# Altium PCB PCB_B1.PcbDoc
Units mm, origin at the board's own origin, x right, y up, seen from the top; angles counter-clockwise.
Board outline 40 x 40 mm, 2 copper layers (Top Layer, Bottom Layer); 52 components, 52 nets, 213 pads, 32 vias.
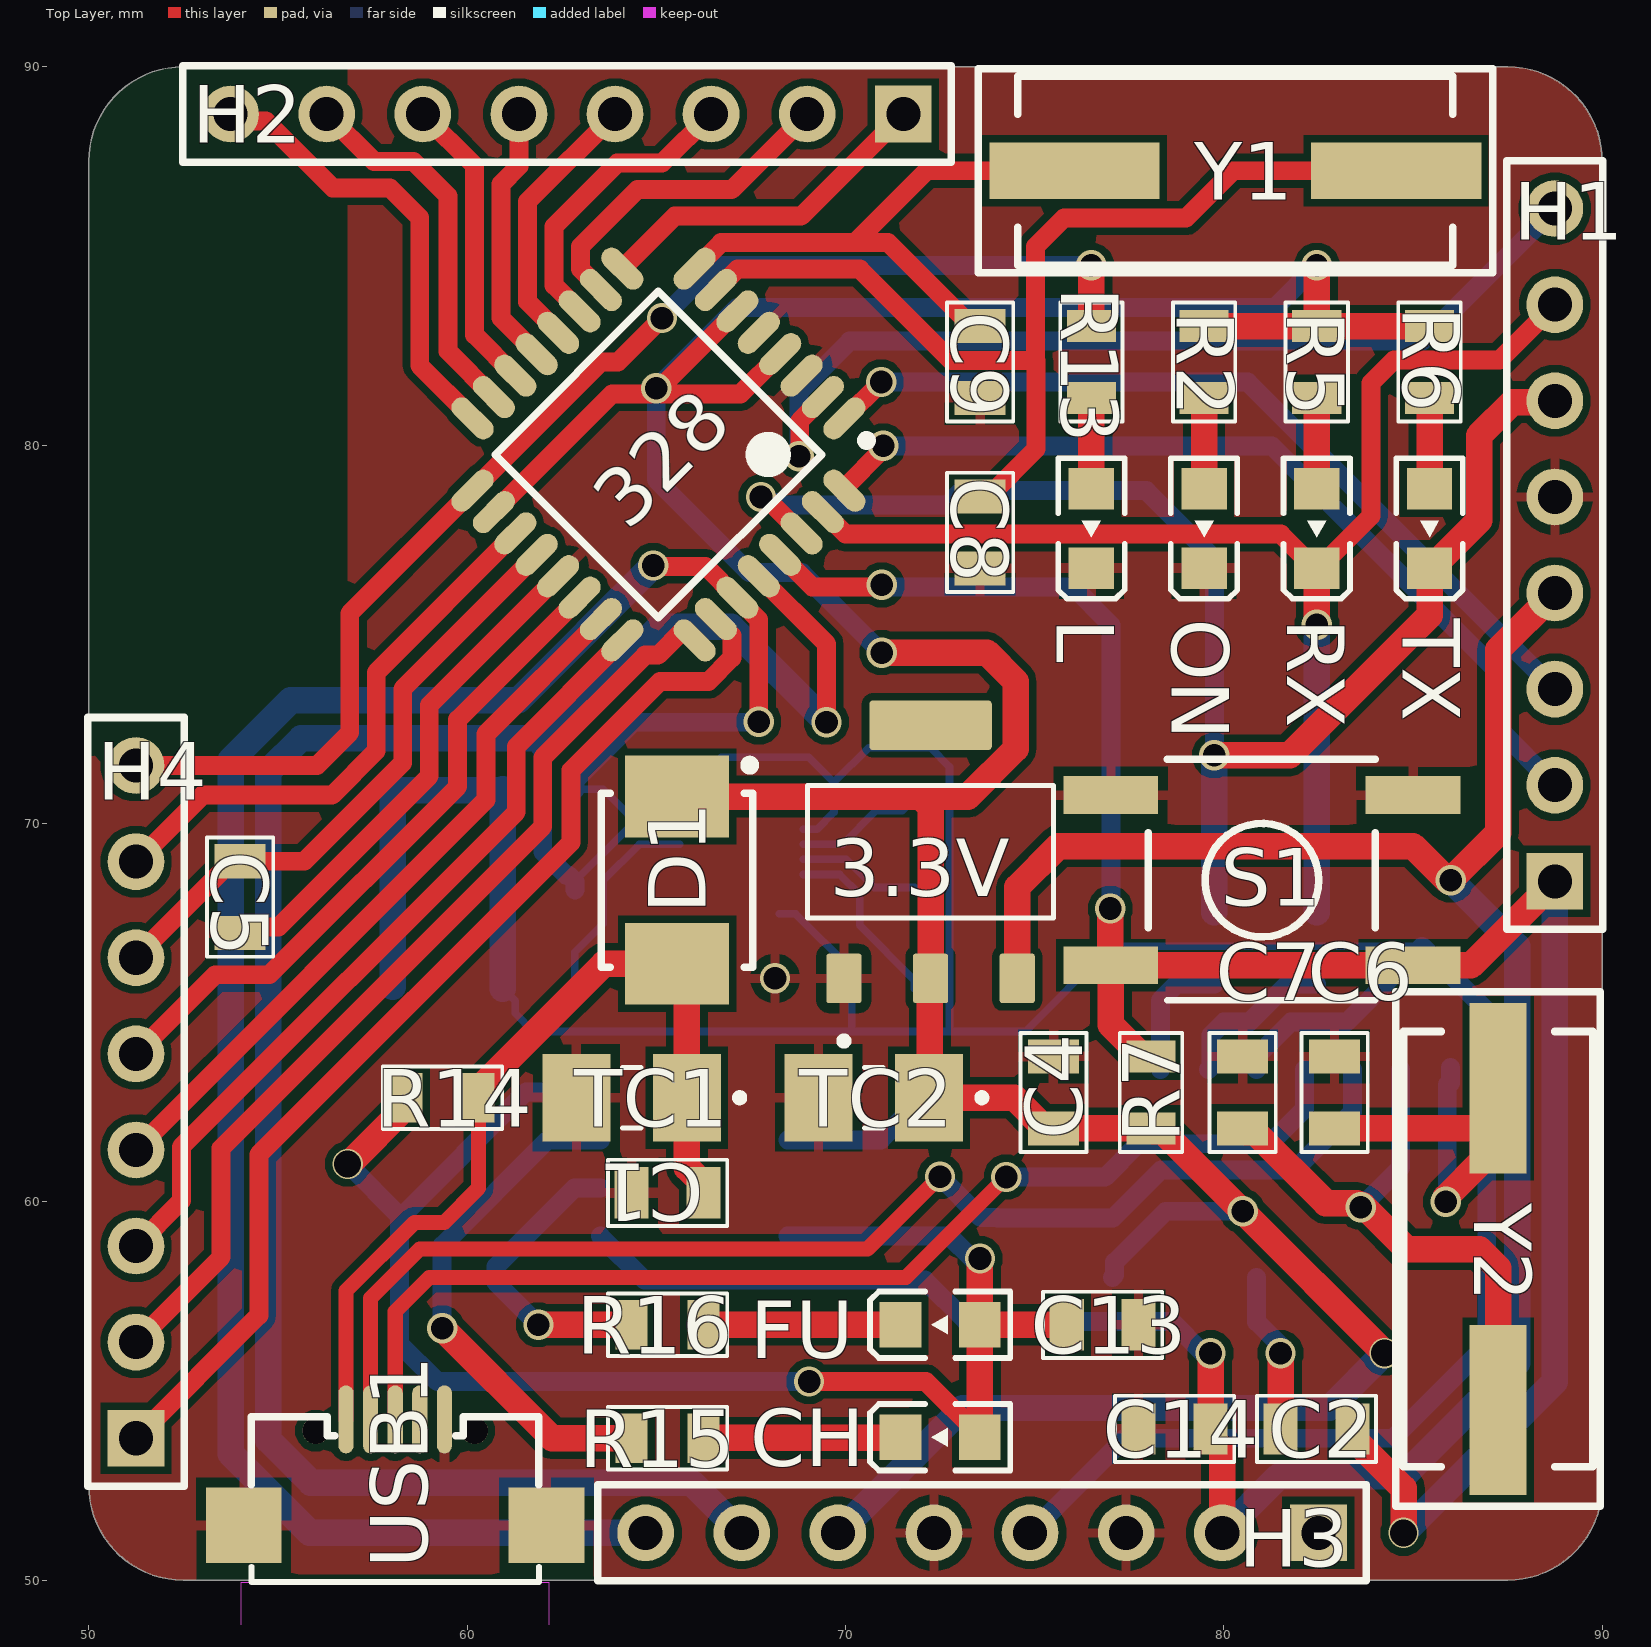
[diagram p0: Top Layer view]
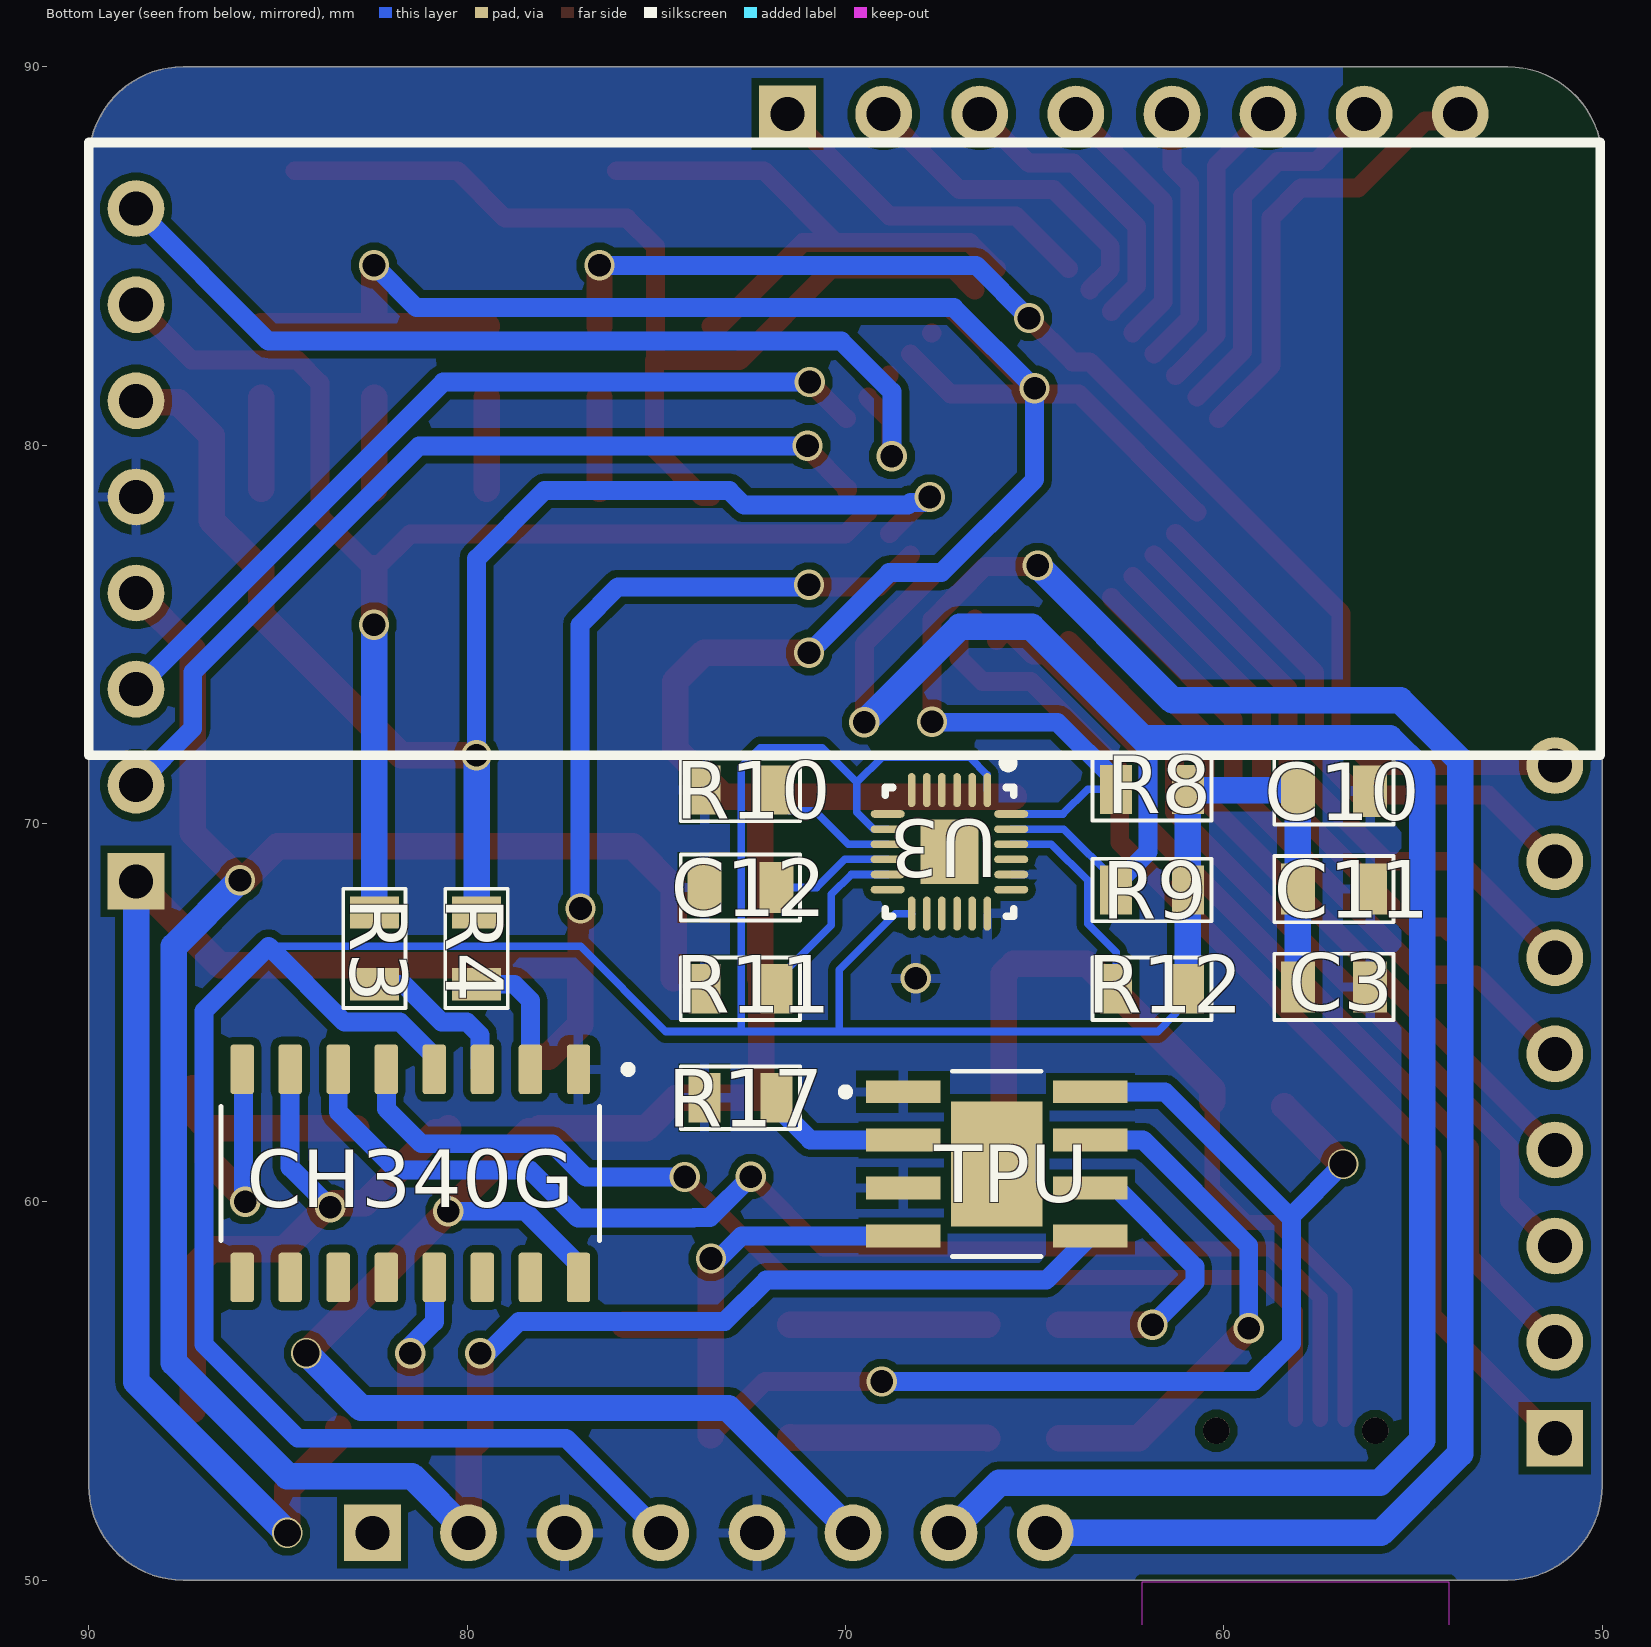
[diagram p1: Bottom Layer view, seen from below]

## Layer stack, top to bottom
Top Solder: solder mask 0.0102, Solder Resist, Dk 3.5
Top Layer: signal copper 0.0356
Dielectric 1: dielectric 0.32, FR-4, Dk 4.8
Bottom Layer: signal copper 0.0356
Bottom Solder: solder mask 0.0102, Solder Resist, Dk 3.5

## Board outline
50,52.5 50,87.5 cw(c52.5,87.5) 52.5,90 87.5,90 cw(c87.5,87.5) 90,87.5 90,52.5 cw(c87.5,52.5) 87.5,50 52.5,50 cw(c52.5,52.5)

## Design rules (kind name [scope] priority, off if disabled: settings)
Clearance [All] p1: gap=0.2 ignorepadtopadclearanceinfootprint=FALSE except(0.1: Arc-SMDPad Track-SMDPad SMDPad-SMDPad)
PolygonConnect [All] p1: connectstyle=Relief reliefconductorwidth=0.254 reliefentries=4 polygonreliefangle="90 Angle" airgapwidth=0.254
RoutingVias [All] p1: holewidth=0.711 width=1.27 viastyle="Through Hole" minholewidth=0.711 minwidth=1.27 maxholewidth=0.711 maxwidth=1.27
SolderMaskExpansion [All] p1: expansion=0.102 istentingtop=FALSE
SupplyNets "Schematic Supply Nets_3" [InNet('VCC')] p1: voltage=0.000
SupplyNets "Schematic Supply Nets_2" [InNet('3.3V')] p2: voltage=0.000
SupplyNets "Schematic Supply Nets_1" [InNet('GND')] p3: voltage=0.000
Width [All] p1: maxlimit=0.7 minlimit=0.2 preferedwidth=0.5
30 further rules are at their usual default settings.

## Components (designator, comment, footprint, x,y, rotation, side; value= is the part's Value field where it differs from the comment)
3.3V "AMS1117-3.3" SOT229P700X180-4N 72.25,69.25 r90 top
328 "" 32A_L 65.058,79.75 r225 top
C1 "0.1uF" CAP0805 58.986,57.578 r0 top
C2 "0.1uF" CAP0805 76.136,51.34 r0 top
C3 "0.1uF" CAP0805 50.776,68.342 r0 bottom
C4 "0.1uF" CAP0805 78.16,56.575 r90 top
C5 "0.1uF" CAP0805 56.66,61.736 r90 top
C6 "22pF" CAP0805 80.27,69.203 r270 top
C7 "22pF" CAP0805 77.84,69.203 r270 top
C8 "22pF" CAP0805 76.218,71.377 r90 top
C9 "22pF" CAP0805 76.218,75.882 r90 top
C10 "0.01uF" CAP0805 50.776,73.51 r0 bottom
C11 "0.1uF" CAP0805 50.776,70.926 r0 bottom
C12 "0.1uF" CAP0805 66.461,70.967 r0 bottom
C13 "10uF" CAP0805 70.486,54.09 r0 top
C14 "10uF" CAP0805 72.386,51.34 r0 top
CH "" LED_SMD_0805 75.221,53.234 r0 top
CH340G "" SOIC127P600X180-16N 81.5,60.75 r270 bottom
D1 "" ONSC-SMB-2-403A-03_V 65.55,68.5 r270 top
FU "" LED_SMD_0805 75.221,56.209 r0 top
H1 "" "Header 8" 108.816,51.579 r90 top
H2 "" "Header 8" 88.421,108.816 r180 top
H3 "" "Header 8" 99.391,71.316 r180 top
H4 "" "Header 8" 71.316,36.859 r90 top
L "" LED_SMD_0805 77.041,80.512 r90 top
ON "" LED_SMD_0805 80.02,80.512 r90 top
R2 "1k" RES0805 81.792,78.509 r90 top
R3 "1k" RES0805 80.137,63.013 r90 bottom
R4 "1k" RES0805 77.437,63.013 r90 bottom
R5 "330" RES0805 84.772,78.509 r90 top
R6 "330" RES0805 87.751,78.509 r90 top
R7 "1k" RES0805 75.762,66.576 r270 top
R8 "10k" RES0805 65.585,68.587 r180 bottom
R9 "10k" RES0805 65.585,65.928 r180 bottom
R10 "10k" RES0805 69.088,73.195 r0 bottom
R11 "10k" RES0805 76.462,63.319 r180 bottom
R12 "10k" RES0805 65.585,63.319 r180 bottom
R13 "1k" RES0805 74.187,85.883 r270 top
R14 "0.4" RES0805 55.666,60.437 r0 top
R15 "1k" RES0805 68.987,56.063 r180 top
R16 "1k" RES0805 61.613,54.437 r0 top
R17 "1.2k" RES0805 76.462,60.437 r180 bottom
RX "" LED_SMD_0805 83,80.512 r90 top
S1 "" "Push Button Switch SMD" 109.478,95.805 r180 top
TC1 "4.7u" CAPMP3516X190N 64.35,62.75 r180 top
TC2 "4.7uF" CAPMP3516X190N 70.75,62.75 r180 top
TPU "" SOIC127P600X175-9N 66,61 r180 bottom
TX "" LED_SMD_0805 85.979,80.512 r90 top
U3 "MPU-9250" INSE-QFN-24-1700X1540TP_M 67.25,69.25 r270 bottom
USB1 "USB MICRO USB_AB_BM_SHS" "USB MICRO USB_AB_BM_SHS" 26.198,99.891 r270 top
Y1 "16MHz" "Crystal SMD" 71.692,82.701 r0 top
Y2 "12MHz" "Crystal SMD" 91.799,50.137 r90 top

## Footprints (in the part's own frame and the unit in brackets; to place one, negate y for a bottom-side part, rotate by r counter-clockwise, add the part's x,y. Pads: shape width x height; smd on the part's side, far side on the other; paste and mask are expansions set on the pad)
32A_L [mm] "Thin QFP, 32-Leads, Body 7x7mm, Pitch 0.8mm, IPC High Density"
  oval 1.35x0.55 smd: 1(-4.15,2.8) 2(-4.15,2) 3(-4.15,1.2) 4(-4.15,0.4) 5(-4.15,-0.4) 6(-4.15,-1.2) 7(-4.15,-2) 8(-4.15,-2.8) 17(4.15,-2.8) 18(4.15,-2) 19(4.15,-1.2) 20(4.15,-0.4) 21(4.15,0.4) 22(4.15,1.2) 23(4.15,2) 24(4.15,2.8)
  oval 0.55x1.35 smd: 9(-2.8,-4.15) 10(-2,-4.15) 11(-1.2,-4.15) 12(-0.4,-4.15) 13(0.4,-4.15) 14(1.2,-4.15) 15(2,-4.15) 16(2.8,-4.15) 25(2.8,4.15) 26(2,4.15) 27(1.2,4.15) 28(0.4,4.15) 29(-0.4,4.15) 30(-1.2,4.15) 31(-2,4.15) 32(-2.8,4.15)
  silkscreen extent -4.27,-3.05 3.05,3.75, body extent -3.5,-3.5 3.5,3.5, height 1.2
CAP0805 [mm]
  rect 0.9x1.35 smd: 1(5.364,2.66) 2(7.264,2.66)
  silkscreen extent 4.74,1.78 7.89,3.53, body extent 5.29,2.01 7.34,3.31, height 0.5
CAPMP3516X190N [mm]
  rect 1.79x2.31 smd: 1(-1.46,0) 2(1.46,0)
  silkscreen extent -2.96,-0.8 0.24,0.8
"Crystal SMD" [mm]
  rect 4.5x1.5 smd: 1(4.363,4.549) 2(12.863,4.549)
  silkscreen extent 1.81,1.85 15.41,7.25, body extent 2.4,2.3 14.7,6.8, height 5.18
"Header 8" [mm]
  rect 1.5x1.5 hole 0.9: 1(16.891,20.066)
  round 1.5 hole 0.9: 2(19.431,20.066) 3(21.971,20.066) 4(24.511,20.066) 5(27.051,20.066) 6(29.591,20.066) 7(32.131,20.066) 8(34.671,20.066)
  silkscreen extent 15.62,18.8 35.94,21.34, body extent 15.62,18.8 35.94,21.34, height 8.38
INSE-QFN-24-1700X1540TP_M [mm] "QFN, 24-Leads, Body 3.1x3.1mm, Pitch 0.40mm, Thermal Pad 1.54x1.70mm, IPC Low Density"
  oval 0.9x0.2 smd: 1(-1.632,1) 2(-1.632,0.6) 3(-1.632,0.2) 4(-1.632,-0.2) 5(-1.632,-0.6) 6(-1.632,-1) 13(1.632,-1) 14(1.632,-0.6) 15(1.632,-0.2) 16(1.632,0.2) 17(1.632,0.6) 18(1.632,1)
  oval 0.2x0.9 smd: 7(-1,-1.632) 8(-0.6,-1.632) 9(-0.2,-1.632) 10(0.2,-1.632) 11(0.6,-1.632) 12(1,-1.632) 19(1,1.632) 20(0.6,1.632) 21(0.2,1.632) 22(-0.2,1.632) 23(-0.6,1.632) 24(-1,1.632)
  rect 1.7x1.54 smd: 25(0,0)
  silkscreen extent -2.47,-1.7 1.7,1.7, body extent -1.55,-1.55 1.55,1.55, height 1.05
LED_SMD_0805 [mm]
  rect 1.1x1.2 smd: 1(-3.767,0.541) 2(-1.667,0.541)
  silkscreen extent -4.57,-0.34 -0.86,1.42, body extent -3.72,-0.08 -1.72,1.17, height 0.7
ONSC-SMB-2-403A-03_V [mm] "Molded, 2-Leads, Body 4.6x3.95mm"
  rect 2.159x2.743 smd: 1(-2.21,0) 2(2.21,0)
  silkscreen extent -3.16,-2 2.3,2.05, body extent -2.3,-1.97 2.3,1.97, height 2.47
"Push Button Switch SMD" [mm]
  rect 2.5x1 smd: 1(24.478,29.555) 1(32.463,29.555) 2(24.478,25.055) 2(32.463,25.055)
  silkscreen extent 25.47,24.1 31.47,30.48, body extent 23.97,24.3 32.97,30.3, height 5
RES0805 [mm]
  rect 0.85x1.3 smd: 1(2.737,2.313) 2(4.637,2.313)
  silkscreen extent 2.11,1.49 5.26,3.14, body extent 2.66,1.66 4.71,2.96, height 0.5
SOIC127P600X175-9N [mm]
  rect 1.97x0.6 smd: 1(-2.475,1.905) 2(-2.475,0.635) 3(-2.475,-0.635) 4(-2.475,-1.905) 5(2.475,-1.905) 6(2.475,-0.635) 7(2.475,0.635) 8(2.475,1.905)
  rect 2.413x3.302 smd paste-3: 9(0,0)
  silkscreen extent -4.1,-2.45 1.17,2.45, body extent -3,-2.45 3,2.45, height 1.75
SOIC127P600X180-16N [mm]
  rrect25% 1.31x0.62 smd: 1(-2.75,4.445) 2(-2.75,3.175) 3(-2.75,1.905) 4(-2.75,0.635) 5(-2.75,-0.635) 6(-2.75,-1.905) 7(-2.75,-3.175) 8(-2.75,-4.445) 9(2.75,-4.445) 10(2.75,-3.175) 11(2.75,-1.905) 12(2.75,-0.635) 13(2.75,0.635) 14(2.75,1.905) 15(2.75,3.175) 16(2.75,4.445)
  silkscreen extent -2.85,-5 1.77,5.85, body extent -3,-5 3,5, height 1.8
SOT229P700X180-4N [mm]
  rrect15% 1.31x0.93 smd: 1(-3.345,2.29) 2(-3.345,0) 3(-3.345,-2.29)
  rrect15% 1.31x3.24 smd: 4(3.345,0)
  silkscreen extent -5.1,-3.25 1.75,3.25, body extent -3.5,-3.25 3.5,3.25, height 1.8
"USB MICRO USB_AB_BM_SHS" [mm]
  oval 1.8x0.4 smd: 1(45.641,30.602) 2(45.641,31.252) 3(45.641,31.902) 4(45.641,32.552) 5(45.641,33.202)
  rect 2x2 smd: 5(48.441,27.902) 5(48.441,35.902)
  round 0.7 hole 0.7: H(45.941,29.802) H(45.941,34.002)
  Keep-Out Layer board cut-out: 49.941,35.966 51.332,35.966 51.332,27.838 49.941,27.838
  silkscreen extent 45.57,28.1 49.94,35.7, body extent 45.26,27.9 51.3,35.9, height 2.75

## Part data
3.3V: "Sot223/Pkg 1-Amp 3.3-Volt Low Drop Out Voltage Regulatator", Package="SOT-223 Seeed Technology", Availability="Not in stock", Check_prices=https://www.snapeda.com/parts/AMS1117-3.3/Advanced+Monolithic+Systems/view-part/?ref=eda, MF="Advanced Monolithic Systems", MP=AMS1117-3.3, Price=None, SnapEDA_Link=https://www.snapeda.com/parts/AMS1117-3.3/Advanced+Monolithic+Systems/view-part/?ref=snap
328: library part CMP-0095-00261-2, "8-bit AVR Microcontroller, 32KB Flash, 1KB EEPROM, 2KB SRAM, 32-pin TQFP, Industrial Grade (-40°C to 85°C)", Code_JEDEC=MS-026-ABA, ComponentLink1Description="Manufacturer URL", ComponentLink1URL=http://www.atmel.com/, ComponentLink2Description="ATmega48A/48PA/88A/88PA/168A/168PA/328/328P Datasheet", ComponentLink2URL=http://www.atmel.com/dyn/resources/prod_documents/doc8271.pdf, ComponentLink3Description="ATmega48A/48PA/88A/88PA/168A/168PA/328/328P Summary", ComponentLink3URL=http://www.atmel.com/dyn/resources/prod_documents/8271S.pdf, DatasheetVersion="revD, May-2011", PackageDescription="32-Lead, 7x7x1.0 mm Body, 0.8mm Lead Pitch, Thin Profile Plastic Quad Flat Package (TQFP)", PackageReference=32A, PackageVersion="revC, Oct-2010", RevisionNote="DatasheetVersion & PackageVersion updated. URLs added."
C1 C2 C3 C4 C5 C6 C7 C8 C9 C10 C11 C12 C13 C14: library part CAP0805, "CAP0805"
CH FU L ON RX TX: library part LED_SMD_0805
CH340G: library part CH340G, "USB Interface Integrated Circuit", Package=None, Availability="Not in stock", Check_prices=https://www.snapeda.com/parts/Ch340G/WCH/view-part/?ref=eda, MF=WCH, MP=Ch340G, Price=None, SnapEDA_Link=https://www.snapeda.com/parts/Ch340G/WCH/view-part/?ref=snap
D1: library part CMP-1055-00372-1, "Schottky Power Rectifier, 2-Pin SMB, Pb-Free, Tape and Reel", Manufacturer="On Semiconductor", PartNumber=SS24T3G, ComponentLink1Description="Manufacturer URL", ComponentLink1URL=http://www.onsemi.com/, ComponentLink2Description=Datasheet, ComponentLink2URL=http://www.onsemi.cn/pub_link/Collateral/SS24-D.PDF, ComponentLink3Description="Package Specification", ComponentLink3URL=http://www.onsemi.com/pub_link/Collateral/403A-03.PDF, Configuration=Single, DatasheetVersion="Rev. 4", IFSM Max (A)=75, Mounting Technology="Surface Mount", PackageDescription="2-Pin Small Molded Package, J-Bend Lead, Body 4.33 x 3.625 mm", PackageReference=SMB-2-403A-03, PackageVersion="Rev. J, 07/2012", Packing="Tape and Reel", RoHS=TRUE
H1 H2 H3 H4: library part "Header 8"
R2 R3 R4 R5 R6 R7 R8 R9 R10 R11 R12 R13 R14 R15 R16 R17: library part RES0805, "RES0805"
S1: library part "Push Button Switch SMD"
TC1 TC2: library part TAJB475K025RNJ, "4.7 ÂµF Molded Tantalum Capacitors 25 V 1411 (3528 Metric), 1210 1.5Ohm", Package="1411 AVX Corporation", Availability="In Stock", Check_prices=https://www.snapeda.com/parts/TAJB475K025RNJ/AVX/view-part/?ref=eda, MF=AVX, MP=TAJB475K025RNJ, Price=None, Purchase-URL=https://pricing.snapeda.com/search/part/TAJB475K025RNJ/?ref=eda, SnapEDA_Link=https://www.snapeda.com/parts/TAJB475K025RNJ/AVX/view-part/?ref=snap
TPU: library part TP4056-42-ESOP8, "TP4056-42-ESOP8 TP", Package=None, Check_prices=https://www.snapeda.com/parts/TP4056-42-ESOP8/Lite-On/view-part/?ref=eda, MF="Lite-On Semiconductor", MP=TP4056-42-ESOP8, SnapEDA_Link=https://www.snapeda.com/parts/TP4056-42-ESOP8/Lite-On/view-part/?ref=snap
U3: library part CMP-2100-03657-1, "9-axis MotionTracking device, 2.4 to 3,6 V, -40 to 85 degC, 24-Pin QFN, RoHS, Tape and Reel", Case/Package=QFN, Manufacturer=InvenSense, Max Operating Temperature=85degC, Max Supply Voltage=3.6V, Min Operating Temperature=-40degC, Min Supply Voltage=2.4V, Package Description="24-Pin Quad Flat No-lead Package, Body 3 x 3 mm, Pitch 0.4 mm", Package Quantity=1, Package Reference=QFN-24, Datasheet URL=http://datasheet.octopart.com/MPU-9250-InvenSense-datasheet-21859386.pdf, Datasheet Version="Rev. 1.0, 01/2014", Height=1mm, Length=3.1mm, Manufacturer URL=http://www.invensense.com/, Mount=SurfaceMount, RoHSCompliant=true, Width=3.1mm
Y1 Y2: library part "Crystal SMD", "Crystal SMD"

## Via types
v1: diameter 0.8, hole 0.6, Top Layer to Bottom Layer, 29 vias
v2: diameter 0.8, hole 0.711, Top Layer to Bottom Layer, 3 vias

## Nets (pads, with @x,y where several pads share a name; then routed paths per layer and width w, separated by ;. In a path a pad name is that pad's centre, name@x,y a point inside that pad or via, vN(x,y) a via of type N, cw(c..) or ccw(c..) an arc to the next point about the centre after c; other vN are vias at no path point)
3.3V: C3.2 C10.2 C11.2 CH340G.4 H3.4 R8.2 R9.2 R12.2 U3.1 U3.8 U3.13 | length 91.5
  Bottom Layer w0.2: R12.2 61.273,65.307 61.273,64.977 61.75,64.5 70.162,64.5 ; U3.1 66.25,71.279 66.721,71.75 69.029,71.75 69.698,71.082 ; U3.13 68.679,67.618 70.162,66.136 70.162,64.5 ; U3.8 69.256,69.85 69.698,70.291 69.698,71.082 ; 85.244,66.75 77,66.75 74.75,64.5 72.75,64.5 ; 69.698,71.082 70.616,72 72.25,72 72.75,71.5 72.75,64.5 ; 70.162,64.5 72.75,64.5
  Bottom Layer w0.5: H3.4 77.38,53.75 84.475,53.75 86.95,56.225 86.95,65.044 85.244,66.75 83.244,64.75 81.77,64.75 80.865,63.845 CH340G.4
  Bottom Layer w0.7: C3.2 C11.2 C10.2 58.065,70.875 60.923,70.875 R8.2 R9.2 R12.2
A0: 328.23 H4.4 | length 19.1
  Top Layer w0.5: H4.4 60.5,70.62 60.5,72.364 328.23
A1: 328.24 H4.3 | length 21.3
  Top Layer w0.5: H4.3 52.45,60.03 52.45,61.45 61.3,70.3 61.3,72.032 328.24
A2: 328.25 H4.2 | length 25.4
  Top Layer w0.5: H4.2 53.5,58.54 53.5,61.416 62,69.916 62,71.742 64.708,74.45 65.048,74.45 65.707,75.109 65.739,75.109 328.25
A3: 328.26 H4.1 | length 29.1
  Top Layer w0.5: H4.1 54.5,57 54.5,61.25 62.75,69.5 62.75,71.406 65.094,73.75 66.377,73.75 67,74.373 67,74.966 66.578,75.388 328.26
A4: 328.27 H3.8 R8.1 U3.24 | length 58.3
  Top Layer w0.5: v1(64.917,76.816) 64.938,76.795 66.302,76.795 67.13,75.967 328.27 67.144,75.953 67.71,75.388 v1(67.71,72.685)
  Bottom Layer w0.2: R8.1 63.6,70.9 64.25,70.25 U3.24
  Bottom Layer w0.5: R8.1 62.848,71.125 64.397,72.675 67.699,72.675 v1(67.71,72.685)
  Bottom Layer w0.7: H3.8 55.846,51.25 53.75,53.346 53.75,71.664 55.336,73.25 61.352,73.25 v1(64.917,76.816)
A5: 328.28 H3.7 R9.1 U3.23 | length 61
  Top Layer w0.5: 328.28 69.5,74.742 v1(69.5,72.675)
  Bottom Layer w0.2: R9.1@62.848,68.466 64.232,69.85 U3.23
  Bottom Layer w0.5: 61.987,72.1 62,72.087 62,69.25 62.609,68.641 62.673,68.641 62.848,68.466 R9.1
  Bottom Layer w0.7: 61.987,72.1 65.082,75.195 66.979,75.195 v1(69.5,72.675) ; 62.137,72.25 55.616,72.25 54.75,71.384 54.75,53.699 55.871,52.578 65.932,52.578 H3.7
A6: 328.19 H4.7 | length 14.8
  Top Layer w0.5: H4.7 53.01,70.75 56.433,70.75 57.6,71.917 57.6,73.989 328.19
A7: 328.22 H4.5 | length 17.8
  Top Layer w0.5: H4.5 53.34,66 54.775,66 59.75,70.975 59.75,72.745 328.22
AREF: 328.20 C5.2 H4.6 | length 16.6
  Top Layer w0.5: H4.6 51.25,66.475 53.775,69 54.225,69 C5.2 55.7,69 58.3,71.6 58.3,73.558 328.20
"D0 / Rx": 328.30 H1.6 R4.2 TX.1 | length 38.4
  Top Layer w0.5: v1(67.77,78.63) 67.862,78.63 68.827,77.664 328.30
  Top Layer w0.7: v1(79.75,71.8) 81.738,71.8 85.438,75.5 TX.1 ; TX.1@85.688,76.945 86.75,78.007 86.75,80.25 87.637,81.137 88.717,81.137 H1.6
  Bottom Layer w0.5: v1(67.77,78.63) 67.918,78.482 68.283,78.482 68.35,78.415 72.685,78.415 73.066,78.795 77.955,78.795 79.75,77 v1(79.75,71.8)
  Bottom Layer w0.7: R4.2 v1(79.75,71.8)
"D1 / Tx": 328.31 H1.7 R3.2 RX.1 | length 34
  Top Layer w0.5: 328.31@69.407,78.243 328.31 69.42,78.23 70.005,77.645 81.509,77.645 82.409,76.745 RX.1 82.509,76.745 83.888,78.125 83.888,81.638 84.5,82.25 87.29,82.25 H1.7
  Top Layer w0.7: v1(82.459,75.25) RX.1
  Bottom Layer w0.7: R3.2@82.455,67.65 82.455,75.246 v1(82.459,75.25)
D2: 328.32 H1.2 | length 24
  Top Layer w0.5: 328.32 69.949,78.818 69.949,78.851 71,79.902 v1(71,79.98)
  Bottom Layer w0.5: v1(71,79.98) 81.27,79.98 87.25,74 87.25,72.51 H1.2
D3: 328.1 H1.3 | length 22.8
  Top Layer w0.5: 328.1 69.986,80.705 v1(70.946,81.665)
  Top Layer w0.7: H1.3@88.597,73.703 H1.3
  Bottom Layer w0.5: v1(70.946,81.665) 80.635,81.665 H1.3
D4: 328.2 H1.8 | length 25.5
  Top Layer w0.5: v1(68.773,79.705) 68.793,79.725 68.793,80.643 69.407,81.257 328.2
  Bottom Layer w0.5: v1(68.773,79.705) 68.773,81.415 70.108,82.75 85.25,82.75 H1.8
D5: 328.9 H2.1 | length 9.1
  Top Layer w0.5: 328.9 65.489,86.05 68.83,86.05 H2.1
D6: 328.10 H2.2 | length 8.8
  Top Layer w0.5: 328.10 63.538,84.112 63,84.65 63,85.25 64.5,86.75 66.99,86.75 H2.2
D7: 328.11 H2.3 | length 7.9
  Top Layer w0.5: 328.11 62.972,83.547 62.3,84.219 62.3,85.78 63.97,87.45 65.15,87.45 H2.3
D8: 328.12 H2.4 | length 7.1
  Top Layer w0.5: 328.12 62.406,82.981 61.6,83.787 61.6,86.44 H2.4
D9: 328.13 H2.5 | length 6.9
  Top Layer w0.5: H2.5 61.37,87.37 60.9,86.9 60.9,83.356 61.841,82.415 328.13
D10: 328.14 H2.6 | length 7.9
  Top Layer w0.5: H2.6 60.2,87.38 60.2,82.911 328.14
"D11 / MOSI": 328.15 H2.7 | length 9.9
  Top Layer w0.5: H2.7 57.54,87.5 58.58,87.5 59.5,86.58 59.5,82.48 328.15
"D12 / MISO": 328.16 H2.8 | length 12
  Top Layer w0.5: H2.8 53.936,88.564 54.686,88.564 56.45,86.8 57.96,86.8 58.75,86.01 58.75,82.098 328.16
"D13 / SCK": 328.17 H4.8 R13.1 | length 34.2
  Top Layer w0.5: H4.8 56.03,71.53 56.9,72.4 56.9,75.552 63.548,82.2 63.994,82.2 v1(65.15,83.356)
  Top Layer w0.7: R13.1 v1(76.5,84.75)
  Bottom Layer w0.5: v1(65.15,83.356) 66.544,84.75 v1(76.5,84.75)
GND: 3.3V.1 328.3 328.5 328.21 C1.1 C3.1 C4.2 C5.1 C6.1 C7.1 C8.1 C9.1 C10.1 C11.1 C12.2 C13.2 C14.1 CH340G.1 H1.5 H3.3 H3.5 L.1 ON.1 R10.2 R11.1 R17.1 S1.2 TC1.2 TC2.2 TPU.1 TPU.3 U3.18 U3.20 USB1.5 | length 13.4
  Top Layer w0.5: C5.1 54.168,67.268 55.018,67.268 59,71.25 59,73.126 328.21 ; 328.5 328.5@67.723,82.967 ; 328.3 328.3@68.841,81.849
  other v1: 68.141,65.905
Net328_7: 328.7 C8.2 Y1.2 | length 27.4
  Top Layer w0.5: 328.7 66.592,84.099 67.143,84.65 70.383,84.65 72.8,82.233 75.041,82.233 ; C8.2 73.783,78.641 75.041,79.9 75.041,82.233 ; Y1.2 80.25,87.25 79,86 75.775,86 75.025,85.25 75.025,82.25 75.041,82.233
Net328_8: 328.8 C9.2 Y1.1 | length 15.3
  Top Layer w0.5: 328.8 66.026,84.664 66.712,85.35 70.25,85.35 ; C9.2 73.333,83.146 71.129,85.35 70.25,85.35 ; Y1.1 72.15,87.25 70.25,85.35
NetC1_2: C1.2 D1.2 R14.2 TC1.1 USB1.1 | length 23.6
  Top Layer w0.4: USB1.1 56.8,57.649 58.607,59.455 59.396,59.455 60.303,60.362 R14.2@60.303,62.653
  Top Layer w0.7: R14.2@60.303,62.653 R14.2 60.303,62.975 63.618,66.29 D1.2 65.81,66.03 TC1.1 65.81,60.903 66.25,60.463 C1.2
NetC2_1: C2.1 CH340G.13 | length 4.3
  Top Layer w0.7: C2.1 v1(81.5,56)
  Bottom Layer w0.5: CH340G.13 80.865,56.824 81.5,56.189 v1(81.5,56)
NetC6_2: C6.2 CH340G.8 Y2.2 | length 11.1
  Top Layer w0.7: C6.2 Y2.2@86.85,61.939 ; v1(85.865,60) 85.865,60.115 86.85,61.1 Y2.2@86.85,61.939 ; Y2.2 87.25,62.339 Y2.2@86.85,61.939
  Bottom Layer w0.5: v1(85.865,60) 85.905,60.04 85.905,63.095 85.954,63.144 85.994,63.144 CH340G.8@85.994,63.549
NetC7_2: C7.2 CH340G.7 Y2.1 | length 16.1
  Top Layer w0.7: C7.2 80.6,61.839 80.825,61.839 82.7,59.964 83.51,59.964 v1(83.619,59.855) ; v1@83.674,59.91 84.839,58.745 86.755,58.745 87.25,58.25 Y2.1
  Bottom Layer w0.5: v1(83.619,59.855) 84.675,60.911 CH340G.7
NetC12_1: C12.1 U3.10 | length 3.3
  Bottom Layer w0.2: U3.10 70.016,69.05 70.759,68.307 C12.1
NetC13_1: C13.1 CH.2 FU.2 R14.1 TPU.4 TPU.8 | length 42.9
  Top Layer w0.5: v1(69.04,55.25) 72.129,55.25 73.554,53.825 CH.2
  Top Layer w0.7: v2(56.844,61) 56.878,61 R14.1@58.403,62.525 ; CH.2@73.554,53.825 FU.2 ; v1(73.554,58.5) FU.2 ; C13.1 FU.2
  Bottom Layer w0.5: v2(56.844,61) 58.247,59.597 ; TPU.8 61.556,62.905 58.247,59.597 ; TPU.4 72.751,59.095 73.346,58.5 v1(73.554,58.5) ; v1(69.04,55.25) 59.216,55.25 58.213,56.252 58.213,59.562 58.247,59.597
NetCH340G_2: CH340G.2 R4.1 | length 3.4
  Bottom Layer w0.5: CH340G.2 78.325,65.325 78.75,65.75 R4.1
NetCH340G_3: CH340G.3 R3.1 | length 4.3
  Bottom Layer w0.5: CH340G.3 79.655,63.56 79.655,64.405 80,64.75 80.675,64.75 81.675,65.75 R3.1
NetCH340G_5: CH340G.5 USB1.3 | length 30.1
  Top Layer w0.4: USB1.3 58.1,57.1 59,58 71.596,58 v1(74.25,60.654)
  Bottom Layer w0.5: v1(74.25,60.654) 76.862,60.654 77.743,61.535 81.21,61.535 82.135,62.46 CH340G.5
NetCH340G_6: CH340G.6 USB1.2 | length 33.2
  Top Layer w0.4: USB1.2 57.45,57.45 58.75,58.75 70.585,58.75 v1(72.5,60.665)
  Bottom Layer w0.5: v1(72.5,60.665) 73.58,59.585 74.003,59.585 74.019,59.569 77.069,59.569 78.335,60.835 81.865,60.835 83.405,62.375 CH340G.6
NetCH_1: CH.1 R15.1 | length 5.2
  Top Layer w0.7: R15.1 66.263,53.763 71.441,53.763 CH.1
NetFU_1: FU.1 R16.2 | length 5.2
  Top Layer w0.7: R16.2 FU.1
NetL_2: L.2 R13.2 | length 2.4
  Top Layer w0.7: L.2 R13.2
NetON_2: ON.2 R2.1 | length 2.4
  Top Layer w0.7: ON.2 R2.1
NetR5_1: R5.1 RX.2 | length 2.4
  Top Layer w0.7: RX.2 R5.1
NetR6_1: R6.1 TX.2 | length 2.4
  Top Layer w0.7: TX.2 R6.1
NetR10_1: R10.1 U3.9 | length 3.7
  Bottom Layer w0.2: U3.9 69.925,69.45 70.807,70.332 71.5,70.332 71.825,70.657 R10.1
NetR11_2: R11.2 U3.11 | length 4.8
  Bottom Layer w0.2: U3.11 69.85,68.65 70.378,68.122 70.378,67.304 71.825,65.857 R11.2
NetR12_1: R12.1 U3.22 | length 5.6
  Bottom Layer w0.2: R12.1 62.848,66.598 63.6,67.35 63.6,68.492 64.558,69.45 U3.22
NetR15_2: R15.2 TPU.7 | length 13.7
  Top Layer w0.7: v1(59.341,56.659) 62.25,53.75 R15.2
  Bottom Layer w0.5: v1(59.341,56.659) 59.341,58.841 62.135,61.635 TPU.7
NetR16_1: R16.1 TPU.6 | length 8.1
  Top Layer w0.7: v1(61.885,56.75) R16.1
  Bottom Layer w0.5: v1(61.885,56.75) 60.762,57.873 60.762,58.287 62.84,60.365 TPU.6
NetR17_2: R17.2 TPU.2 | length 3.9
  Bottom Layer w0.5: TPU.2 70.935,61.635 71.825,62.525 R17.2
RESET: 328.29 C2.2 H1.1 R7.1 S1.1 | length 56.4
  Top Layer w0.5: 328.29 69.124,76.25 70.907,76.25 v1(70.962,76.305)
  Top Layer w0.7: v1(77,67.75) 77,66.265 S1.1@77.015,66.25 ; R7.1 77.85,63.839 77.015,64.674 S1.1@77.015,66.25 ; C2.2 83.4,53.775 84.75,52.425 v2(84.75,51.25) ; H1.1 86.53,66.25 85,66.25 S1.1@77.015,66.25
  Bottom Layer w0.5: v1(70.962,76.305) 71.017,76.25 76.015,76.25 77.015,75.25 77.015,67.765 v1(77,67.75)
  Bottom Layer w0.7: v2(84.75,51.25) 88.75,55.25 H1.1
VCC: 3.3V.2 328.4 328.6 328.18 C4.1 CH340G.16 D1.1 H3.6 R2.2 R5.2 R6.2 R7.2 TC2.1 | length 107.9
  Top Layer w0.5: 328.18 63.832,81.353 64.853,81.353 v1(65,81.5) ; 328.6 67.13,83.533 65.097,81.5 v1(65,81.5) ; 328.4 67.226,81.353 65.147,81.353 v1(65,81.5)
  Top Layer w0.7: D1.1 71.988,70.71 ; v1(70.962,74.513) 73.737,74.513 74.5,73.75 74.5,71.972 73.238,70.71 71.988,70.71 ; R2.2 R5.2 ; v1(82.459,84.75) R5.2 ; v2(84.25,56) v1(80.5,59.75) 80.489,59.75 78.375,61.864 78.15,61.864 R7.2 C4.1 75.275,61.939 74.464,62.75 TC2.1 72.23,62.77 72.23,65.885 3.3V.2 72.25,70.448 71.988,70.71 ; R6.2 R5.2
  Bottom Layer w0.5: v1(70.962,74.513) 68.848,76.627 67.461,76.627 65,79.089 v1(65,81.5) 67.133,83.633 81.342,83.633 v1(82.459,84.75) ; CH340G.16 77.115,58.06 77.115,58.405 78.46,59.75 v1(80.5,59.75)
  Bottom Layer w0.7: H3.6 73.1,54.55 82.8,54.55 v2(84.25,56)
VIN: 3.3V.3 C14.2 H1.4 H3.2 TPU.5 | length 68.8
  Top Layer w0.7: 3.3V.3 74.54,68.313 75.627,69.4 85,69.4 85.9,68.5 v1(86,68.5) 87.25,69.75 87.25,74.59 H1.4 ; v1(79.65,56) 79.65,53.775 79.96,53.465 H3.2
  Bottom Layer w0.5: TPU.5 64.692,57.928 72.099,57.928 73.19,56.837 78.623,56.837 79.461,56 v1(79.65,56)
  Bottom Layer w0.7: H3.2 81.46,52.75 84.75,52.75 87.75,55.75 87.75,66.75 v1(86,68.5)
pads on no net: 3.3V.4 CH340G.9 CH340G.10 CH340G.11 CH340G.12 CH340G.14 CH340G.15 H3.1 TPU.9 U3.2 U3.3 U3.4 U3.5 U3.6 U3.7 U3.12 U3.14 U3.15 U3.16 U3.17 U3.19 U3.21 U3.25 USB1.4 USB1.H

## Polygon pours and split planes (outlines as drawn)
GND on Bottom Layer "GND_L02_P003" (solid, pour order 3): 52.5,50 cw(c52.5,52.5) 50,52.5 50,71.817 56.85,71.817 56.85,90 87.5,90 cw(c87.5,87.5) 90,87.5 90,52.5 cw(c87.5,52.5) 87.5,50
GND on Top Layer "GND_L01_P002" (solid, pour order 2): 52.5,50 cw(c52.5,52.5) 50,52.5 50,71.817 56.85,71.817 56.85,90 87.5,90 cw(c87.5,87.5) 90,87.5 90,52.5 cw(c87.5,52.5) 87.5,50

## Silkscreen, mask and mechanical layers (free items; w line width, h text height)
Bottom Overlay:
  lines w0.254: 50.05,87.997 89.997,87.997 ; 50.05,88 50.05,71.8 90,71.8 90,88
Mechanical 1:
  lines w0.254: 49.997,71.817 56.85,71.817 56.85,90 87.5,90 ; 50,71.817 50,52.5 ; 50,52.5 ccw(c52.5,52.5) 52.5,50 87.5,50 ccw(c87.5,52.5) 90,52.5 90,87.5 ccw(c87.5,87.5) 87.5,90 ; 50,52.5 50,87.5 cw(c52.5,87.5) 52.5,90 87.5,90

## Text inside footprints (layer, text, board x,y; h text height)
USB1: Mechanical 1 "PCB EDGE" at 60.513,49.702 h0.7 r180